# Altium PCB ExchangeDisplay.PcbDoc (part 2 of 3)
Units mil, origin at the board's own origin, x right, y up, seen from the top; angles counter-clockwise.
Board outline 17200 x 6515 mil, 2 copper layers (Top Layer, Bottom Layer); 256 components, 104 nets, 649 pads, 121 vias.
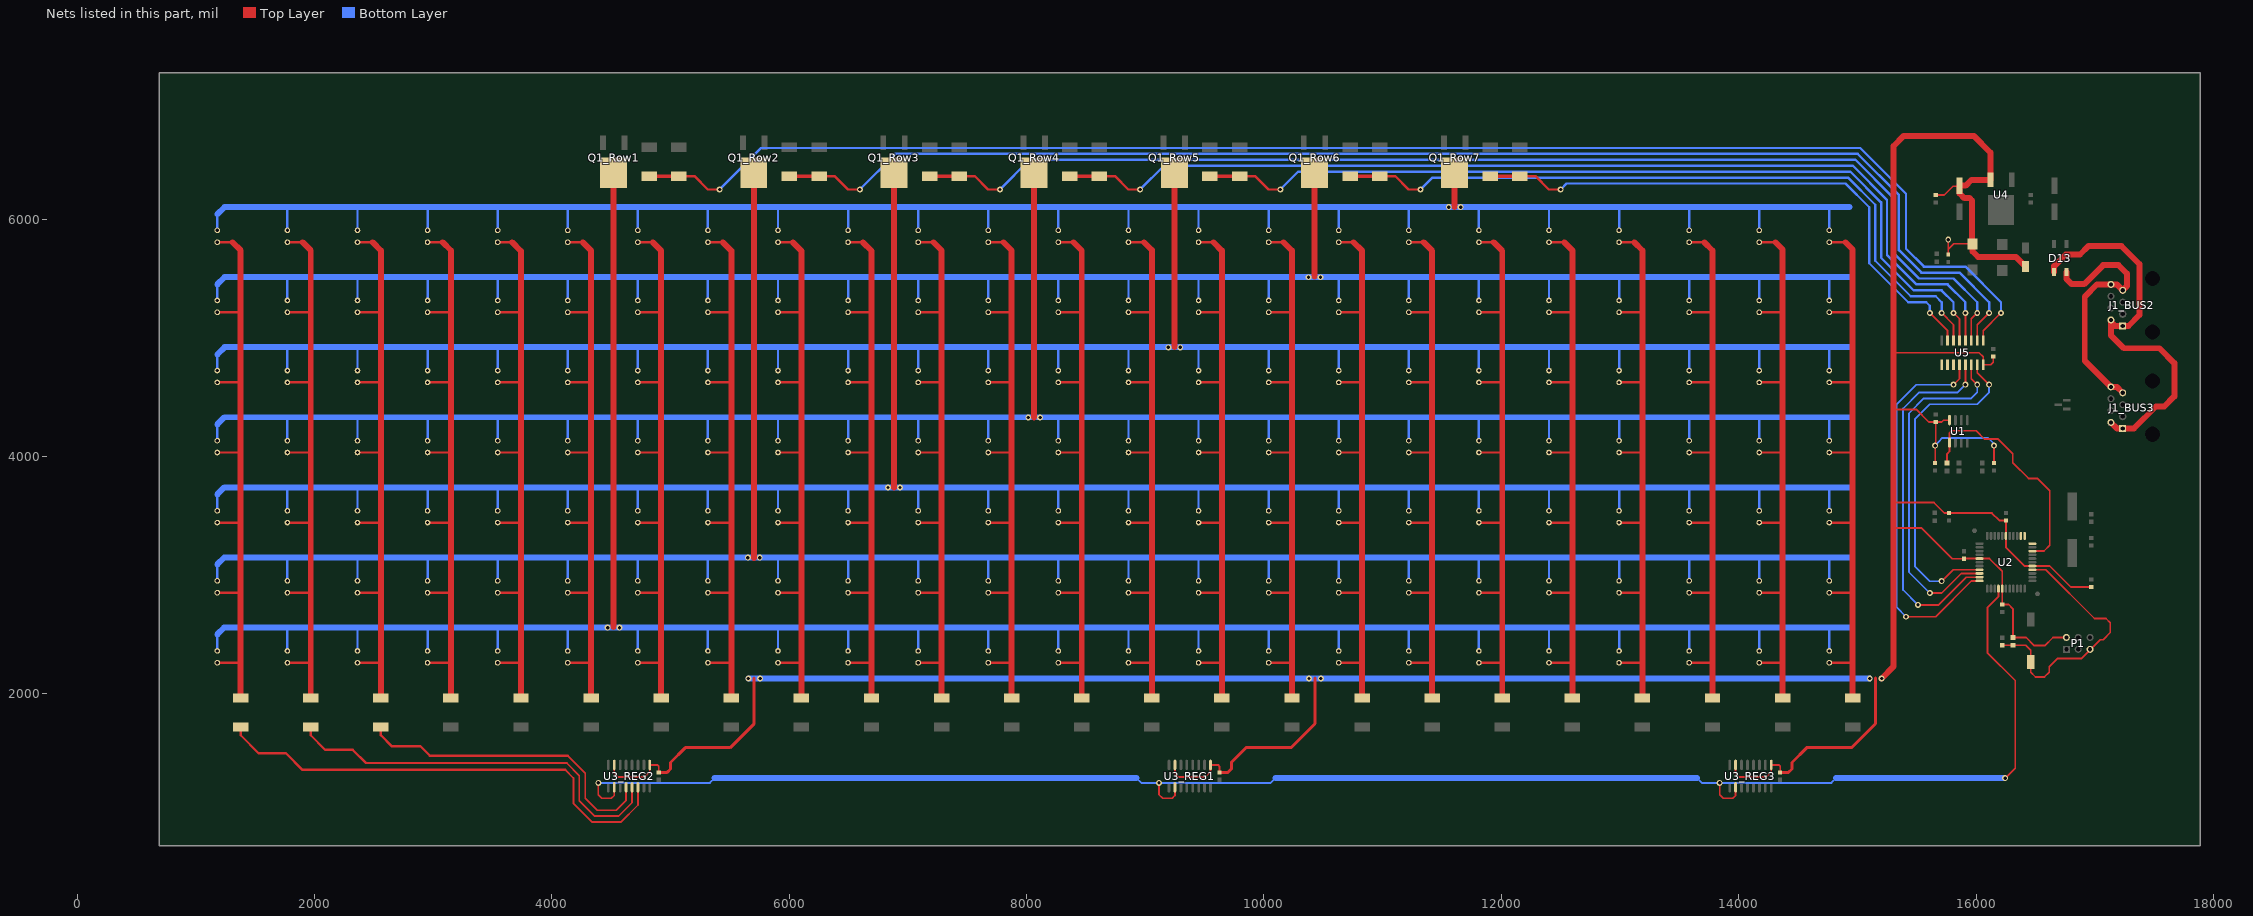
[diagram p2: the nets of this part, all layers, seen from the top]

## Via types
v1: diameter 50, hole 28, Top Layer to Bottom Layer, 121 vias

## Nets (pads, with @x,y where several pads share a name; then routed paths per layer and width w, separated by ;. In a path a pad name is that pad's centre, name@x,y a point inside that pad or via, vN(x,y) a via of type N, cw(c..) or ccw(c..) an arc to the next point about the centre after c; other vN are vias at no path point) (continued)
NetR30_2: R30.2 U3_REG2.12 | length 2665.4
  Top Layer w15: 4132.35,1480 4281.18,1331.17 4281.18,1120 4381.18,1020 4541.18,1020 4625.31,1104.13 U3_REG2.12@4625.31,1212.91
  Top Layer w20: R30.2@2559.05,1721.42 2559.05,1651.02 2650.08,1560 2891.18,1560 2971.18,1480 4132.35,1480
NetR31_2: R31.2 U3_REG2.13 | length 3359
  Top Layer w15: 4124.95,1417.4 4231.18,1311.17 4231.18,1100 4361.18,970 4561.18,970 4675.31,1084.13 U3_REG2.13@4675.31,1212.91
  Top Layer w20: R31.2@1968.5,1721.42 1968.5,1651.02 2089.53,1530 2321.18,1530 2433.78,1417.4 4124.95,1417.4
NetR32_2: R32.2 U3_REG2.14 | length 4052.8
  Top Layer w15: 4112.43,1360 4181.18,1291.25 4181.18,1080 4341.18,920 4581.18,920 4725.31,1064.13 U3_REG2.14@4725.31,1212.91
  Top Layer w20: R32.2@1377.95,1721.42 1377.95,1651.02 1528.98,1500 1758.98,1500 1898.98,1360 4112.43,1360
NetU5_9: U5.9
NetU5_10: U5.10
NetU5_11: U5.11
OUT_Row1: D5_Row1.A D6_Row1.A D7_Row1.A D8_Row1.A D9_Row1.A D10_Row1.A D11_Row1.A D17_Row1.A D18_Row1.A D19_Row1.A D20_Row1.A D21_Row1.A D22_Row1.A D23_Row1.A D24_Row1.A D25_Row1.A D26_Row1.A D27_Row1.A D28_Row1.A D29_Row1.A D30_Row1.A D31_Row1.A D32_Row1.A D33_Row1.A Q1_Row1.2 | length 22171.9
  Top Layer w50: 4520.28,2562 Q1_Row1.2@4520.28,6290.51
  Bottom Layer w20: D33_Row1.A@1181.1,2362.2 1181.1,2501.1 ; D32_Row1.A@1771.65,2362.2 1771.65,2559.05 ; D31_Row1.A@2362.2,2362.2 2362.2,2559.05 ; D30_Row1.A@2952.76,2362.2 2952.76,2559.05 ; D29_Row1.A@3543.31,2362.2 3543.31,2559.05 ; D28_Row1.A@4133.86,2362.2 4133.86,2559.05 ; D27_Row1.A@4724.41,2362.2 4724.41,2559.05 ; D26_Row1.A@5314.96,2362.2 5314.96,2559.05 ; D25_Row1.A@5905.51,2362.2 5905.51,2559.05 ; D24_Row1.A@6496.06,2362.2 6496.06,2559.05 ; D23_Row1.A@7086.61,2362.2 7086.61,2559.05 ; D22_Row1.A@7677.17,2362.2 7677.16,2559.05 ; D21_Row1.A@8267.72,2362.2 8267.72,2559.05 ; D20_Row1.A@8858.27,2362.2 8858.27,2559.05 ; D19_Row1.A@9448.82,2362.2 9448.82,2559.05 ; D18_Row1.A@10039.37,2362.2 10039.37,2559.05 ; D17_Row1.A@10629.92,2362.2 10629.92,2559.05 ; D11_Row1.A@11220.47,2362.2 11220.47,2559.05 ; D10_Row1.A@11811.02,2362.2 11811.02,2559.05 ; D9_Row1.A@12401.57,2362.2 12401.57,2559.05 ; D8_Row1.A@12992.13,2362.2 12992.13,2559.05 ; D7_Row1.A@13582.68,2362.2 13582.68,2559.05 ; D6_Row1.A@14173.23,2362.2 14173.23,2559.05 ; D5_Row1.A@14763.78,2362.2 14763.78,2559.05
  Bottom Layer w50: 1181.1,2501.1 1239.05,2559.05 14934,2559.05
  other v1: 4470.39,2557.69 4570.39,2557.69
OUT_Row2: D5_Row2.A D6_Row2.A D7_Row2.A D8_Row2.A D9_Row2.A D10_Row2.A D11_Row2.A D17_Row2.A D18_Row2.A D19_Row2.A D20_Row2.A D21_Row2.A D22_Row2.A D23_Row2.A D24_Row2.A D25_Row2.A D26_Row2.A D27_Row2.A D28_Row2.A D29_Row2.A D30_Row2.A D31_Row2.A D32_Row2.A D33_Row2.A Q1_Row2.2 | length 21587.5
  Top Layer w50: 5701.39,3146 Q1_Row2.2@5701.39,6290.51
  Bottom Layer w20: D33_Row2.A@1181.1,2952.76 1181.1,3091.1 ; D32_Row2.A@1771.65,2952.76 1771.65,3149.61 ; D31_Row2.A@2362.2,2952.76 2362.2,3149.61 ; D30_Row2.A@2952.76,2952.76 2952.76,3149.61 ; D29_Row2.A@3543.31,2952.76 3543.31,3149.61 ; D28_Row2.A@4133.86,2952.76 4133.86,3149.61 ; D27_Row2.A@4724.41,2952.76 4724.41,3149.61 ; D26_Row2.A@5314.96,2952.76 5314.96,3149.61 ; D25_Row2.A@5905.51,2952.76 5905.51,3149.61 ; D24_Row2.A@6496.06,2952.76 6496.06,3149.61 ; D23_Row2.A@7086.61,2952.76 7086.61,3149.61 ; D22_Row2.A@7677.17,2952.76 7677.16,3149.61 ; D21_Row2.A@8267.72,2952.76 8267.72,3149.61 ; D20_Row2.A@8858.27,2952.76 8858.27,3149.61 ; D19_Row2.A@9448.82,2952.76 9448.82,3149.61 ; D18_Row2.A@10039.37,2952.76 10039.37,3149.61 ; D17_Row2.A@10629.92,2952.76 10629.92,3149.61 ; D11_Row2.A@11220.47,2952.76 11220.47,3149.61 ; D10_Row2.A@11811.02,2952.76 11811.02,3149.61 ; D9_Row2.A@12401.57,2952.76 12401.57,3149.61 ; D8_Row2.A@12992.13,2952.76 12992.13,3149.61 ; D7_Row2.A@13582.68,2952.76 13582.68,3149.61 ; D6_Row2.A@14173.23,2952.76 14173.23,3149.61 ; D5_Row2.A@14763.78,2952.76 14763.78,3149.61
  Bottom Layer w50: 1181.1,3091.1 1239.61,3149.61 14934,3149.61
  other v1: 5651.49,3148.24 5751.49,3148.24
OUT_Row3: D5_Row3.A D6_Row3.A D7_Row3.A D8_Row3.A D9_Row3.A D10_Row3.A D11_Row3.A D17_Row3.A D18_Row3.A D19_Row3.A D20_Row3.A D21_Row3.A D22_Row3.A D23_Row3.A D24_Row3.A D25_Row3.A D26_Row3.A D27_Row3.A D28_Row3.A D29_Row3.A D30_Row3.A D31_Row3.A D32_Row3.A D33_Row3.A Q1_Row3.2 | length 20996.2
  Top Layer w50: 6882.49,3737 Q1_Row3.2@6882.49,6290.51
  Bottom Layer w20: D33_Row3.A@1181.1,3543.31 1181.1,3681.1 ; D32_Row3.A@1771.65,3543.31 1771.65,3740.16 ; D31_Row3.A@2362.2,3543.31 2362.2,3740.16 ; D30_Row3.A@2952.76,3543.31 2952.76,3740.16 ; D29_Row3.A@3543.31,3543.31 3543.31,3740.16 ; D28_Row3.A@4133.86,3543.31 4133.86,3740.16 ; D27_Row3.A@4724.41,3543.31 4724.41,3740.16 ; D26_Row3.A@5314.96,3543.31 5314.96,3740.16 ; D25_Row3.A@5905.51,3543.31 5905.51,3740.16 ; D24_Row3.A@6496.06,3543.31 6496.06,3740.16 ; D23_Row3.A@7086.61,3543.31 7086.61,3740.16 ; D22_Row3.A@7677.17,3543.31 7677.16,3740.16 ; D21_Row3.A@8267.72,3543.31 8267.72,3740.16 ; D20_Row3.A@8858.27,3543.31 8858.27,3740.16 ; D19_Row3.A@9448.82,3543.31 9448.82,3740.16 ; D18_Row3.A@10039.37,3543.31 10039.37,3740.16 ; D17_Row3.A@10629.92,3543.31 10629.92,3740.16 ; D11_Row3.A@11220.47,3543.31 11220.47,3740.16 ; D10_Row3.A@11811.02,3543.31 11811.02,3740.16 ; D9_Row3.A@12401.57,3543.31 12401.57,3740.16 ; D8_Row3.A@12992.13,3543.31 12992.13,3740.16 ; D7_Row3.A@13582.68,3543.31 13582.68,3740.16 ; D6_Row3.A@14173.23,3543.31 14173.23,3740.16 ; D5_Row3.A@14763.78,3543.31 14763.78,3740.16
  Bottom Layer w50: 1181.1,3681.1 1240.16,3740.16 14934,3740.16
  other v1: 6832.59,3738.8 6932.59,3738.8
OUT_Row4: D5_Row4.A D6_Row4.A D7_Row4.A D8_Row4.A D9_Row4.A D10_Row4.A D11_Row4.A D17_Row4.A D18_Row4.A D19_Row4.A D20_Row4.A D21_Row4.A D22_Row4.A D23_Row4.A D24_Row4.A D25_Row4.A D26_Row4.A D27_Row4.A D28_Row4.A D29_Row4.A D30_Row4.A D31_Row4.A D32_Row4.A D33_Row4.A Q1_Row4.2 | length 20402.9
  Top Layer w50: 8063.59,4330 Q1_Row4.2@8063.59,6290.51
  Bottom Layer w20: D33_Row4.A@1181.1,4133.86 1181.1,4271.1 ; D32_Row4.A@1771.65,4133.86 1771.65,4330.71 ; D31_Row4.A@2362.2,4133.86 2362.2,4330.71 ; D30_Row4.A@2952.76,4133.86 2952.76,4330.71 ; D29_Row4.A@3543.31,4133.86 3543.31,4330.71 ; D28_Row4.A@4133.86,4133.86 4133.86,4330.71 ; D27_Row4.A@4724.41,4133.86 4724.41,4330.71 ; D26_Row4.A@5314.96,4133.86 5314.96,4330.71 ; D25_Row4.A@5905.51,4133.86 5905.51,4330.71 ; D24_Row4.A@6496.06,4133.86 6496.06,4330.71 ; D23_Row4.A@7086.61,4133.86 7086.61,4330.71 ; D22_Row4.A@7677.17,4133.86 7677.16,4330.71 ; D21_Row4.A@8267.72,4133.86 8267.72,4330.71 ; D20_Row4.A@8858.27,4133.86 8858.27,4330.71 ; D19_Row4.A@9448.82,4133.86 9448.82,4330.71 ; D18_Row4.A@10039.37,4133.86 10039.37,4330.71 ; D17_Row4.A@10629.92,4133.86 10629.92,4330.71 ; D11_Row4.A@11220.47,4133.86 11220.47,4330.71 ; D10_Row4.A@11811.02,4133.86 11811.02,4330.71 ; D9_Row4.A@12401.57,4133.86 12401.57,4330.71 ; D8_Row4.A@12992.13,4133.86 12992.13,4330.71 ; D7_Row4.A@13582.68,4133.86 13582.68,4330.71 ; D6_Row4.A@14173.23,4133.86 14173.23,4330.71 ; D5_Row4.A@14763.78,4133.86 14763.78,4330.71
  Bottom Layer w50: 1181.1,4271.1 1240.71,4330.71 14934,4330.71
  other v1: 8013.69,4329.35 8113.69,4329.35
OUT_Row5: D5_Row5.A D6_Row5.A D7_Row5.A D8_Row5.A D9_Row5.A D10_Row5.A D11_Row5.A D17_Row5.A D18_Row5.A D19_Row5.A D20_Row5.A D21_Row5.A D22_Row5.A D23_Row5.A D24_Row5.A D25_Row5.A D26_Row5.A D27_Row5.A D28_Row5.A D29_Row5.A D30_Row5.A D31_Row5.A D32_Row5.A D33_Row5.A Q1_Row5.2 | length 19809.9
  Top Layer w50: 9244.69,4922 Q1_Row5.2@9244.69,6290.51
  Bottom Layer w20: D33_Row5.A@1181.1,4724.41 1181.1,4860 ; D32_Row5.A@1771.65,4724.41 1771.65,4921.26 ; D31_Row5.A@2362.2,4724.41 2362.2,4921.26 ; D30_Row5.A@2952.76,4724.41 2952.76,4921.26 ; D29_Row5.A@3543.31,4724.41 3543.31,4921.26 ; D28_Row5.A@4133.86,4724.41 4133.86,4921.26 ; D27_Row5.A@4724.41,4724.41 4724.41,4921.26 ; D26_Row5.A@5314.96,4724.41 5314.96,4921.26 ; D25_Row5.A@5905.51,4724.41 5905.51,4921.26 ; D24_Row5.A@6496.06,4724.41 6496.06,4921.26 ; D23_Row5.A@7086.61,4724.41 7086.61,4921.26 ; D22_Row5.A@7677.17,4724.41 7677.16,4921.26 ; D21_Row5.A@8267.72,4724.41 8267.72,4921.26 ; D20_Row5.A@8858.27,4724.41 8858.27,4921.26 ; D19_Row5.A@9448.82,4724.41 9448.82,4921.26 ; D18_Row5.A@10039.37,4724.41 10039.37,4921.26 ; D17_Row5.A@10629.92,4724.41 10629.92,4921.26 ; D11_Row5.A@11220.47,4724.41 11220.47,4921.26 ; D10_Row5.A@11811.02,4724.41 11811.02,4921.26 ; D9_Row5.A@12401.57,4724.41 12401.57,4921.26 ; D8_Row5.A@12992.13,4724.41 12992.13,4921.26 ; D7_Row5.A@13582.68,4724.41 13582.68,4921.26 ; D6_Row5.A@14173.23,4724.41 14173.23,4921.26 ; D5_Row5.A@14763.78,4724.41 14763.78,4921.26
  Bottom Layer w50: 1181.1,4860 1242.36,4921.26 14934,4921.26
  other v1: 9194.8,4919.9 9294.8,4919.9
OUT_Row6: D5_Row6.A D6_Row6.A D7_Row6.A D8_Row6.A D9_Row6.A D10_Row6.A D11_Row6.A D17_Row6.A D18_Row6.A D19_Row6.A D20_Row6.A D21_Row6.A D22_Row6.A D23_Row6.A D24_Row6.A D25_Row6.A D26_Row6.A D27_Row6.A D28_Row6.A D29_Row6.A D30_Row6.A D31_Row6.A D32_Row6.A D33_Row6.A Q1_Row6.2 | length 19216.2
  Top Layer w50: 10425.8,5516 Q1_Row6.2@10425.8,6290.51
  Bottom Layer w20: D33_Row6.A@1181.1,5314.96 1181.1,5451.1 ; D32_Row6.A@1771.65,5314.96 1771.65,5511.81 ; D31_Row6.A@2362.2,5314.96 2362.2,5511.81 ; D30_Row6.A@2952.76,5314.96 2952.76,5511.81 ; D29_Row6.A@3543.31,5314.96 3543.31,5511.81 ; D28_Row6.A@4133.86,5314.96 4133.86,5511.81 ; D27_Row6.A@4724.41,5314.96 4724.41,5511.81 ; D26_Row6.A@5314.96,5314.96 5314.96,5511.81 ; D25_Row6.A@5905.51,5314.96 5905.51,5511.81 ; D24_Row6.A@6496.06,5314.96 6496.06,5511.81 ; D23_Row6.A@7086.61,5314.96 7086.61,5511.81 ; D22_Row6.A@7677.17,5314.96 7677.17,5511.81 ; D21_Row6.A@8267.72,5314.96 8267.72,5511.81 ; D20_Row6.A@8858.27,5314.96 8858.27,5511.81 ; D19_Row6.A@9448.82,5314.96 9448.82,5511.81 ; D18_Row6.A@10039.37,5314.96 10039.37,5511.81 ; D17_Row6.A@10629.92,5314.96 10629.92,5511.81 ; D11_Row6.A@11220.47,5314.96 11220.47,5511.81 ; D10_Row6.A@11811.02,5314.96 11811.02,5511.81 ; D9_Row6.A@12401.57,5314.96 12401.57,5511.81 ; D8_Row6.A@12992.13,5314.96 12992.13,5511.81 ; D7_Row6.A@13582.68,5314.96 13582.68,5511.81 ; D6_Row6.A@14173.23,5314.96 14173.23,5511.81 ; D5_Row6.A@14763.78,5314.96 14763.78,5511.81
  Bottom Layer w50: 1181.1,5451.1 1241.81,5511.81 14934,5511.81
  other v1: 10375.9,5510.45 10475.9,5510.45
OUT_Row7: D5_Row7.A D6_Row7.A D7_Row7.A D8_Row7.A D9_Row7.A D10_Row7.A D11_Row7.A D17_Row7.A D18_Row7.A D19_Row7.A D20_Row7.A D21_Row7.A D22_Row7.A D23_Row7.A D24_Row7.A D25_Row7.A D26_Row7.A D27_Row7.A D28_Row7.A D29_Row7.A D30_Row7.A D31_Row7.A D32_Row7.A D33_Row7.A Q1_Row7.2 | length 18627.9
  Top Layer w50: 11606.9,6104 Q1_Row7.2@11606.9,6290.51
  Bottom Layer w20: D33_Row7.A@1181.1,5905.51 1181.1,6041.1 ; D32_Row7.A@1771.65,5905.51 1771.65,6102.36 ; D31_Row7.A@2362.2,5905.51 2362.2,6102.36 ; D30_Row7.A@2952.76,5905.51 2952.76,6102.36 ; D29_Row7.A@3543.31,5905.51 3543.31,6102.36 ; D28_Row7.A@4133.86,5905.51 4133.86,6102.36 ; D27_Row7.A@4724.41,5905.51 4724.41,6102.36 ; D26_Row7.A@5314.96,5905.51 5314.96,6102.36 ; D25_Row7.A@5905.51,5905.51 5905.51,6102.36 ; D24_Row7.A@6496.06,5905.51 6496.06,6102.36 ; D23_Row7.A@7086.61,5905.51 7086.61,6102.36 ; D22_Row7.A@7677.17,5905.51 7677.16,6102.36 ; D21_Row7.A@8267.72,5905.51 8267.72,6102.36 ; D20_Row7.A@8858.27,5905.51 8858.27,6102.36 ; D19_Row7.A@9448.82,5905.51 9448.82,6102.36 ; D18_Row7.A@10039.37,5905.51 10039.37,6102.36 ; D17_Row7.A@10629.92,5905.51 10629.92,6102.36 ; D11_Row7.A@11220.47,5905.51 11220.47,6102.36 ; D10_Row7.A@11811.02,5905.51 11811.02,6102.36 ; D9_Row7.A@12401.57,5905.51 12401.57,6102.36 ; D8_Row7.A@12992.13,5905.51 12992.13,6102.36 ; D7_Row7.A@13582.68,5905.51 13582.68,6102.36 ; D6_Row7.A@14173.23,5905.51 14173.23,6102.36 ; D5_Row7.A@14763.78,5905.51 14763.78,6102.36
  Bottom Layer w50: 1181.1,6041.1 1242.36,6102.36 14934,6102.36
  other v1: 11557,6101 11657,6101
PIN_A: U2.30 U5.15 | length 2868.2
  Top Layer w15: v1(15710,2950) 15806.1,3046.1 U2.30@16029.37,3046.1 ; U5.15@16010,4772.64 16010,4705.28 v1(16110,4605.28)
  Bottom Layer w15: v1(15710,2950) 15610,2950 15485,3075 15485,4315 15610,4440 16010,4440 16110,4540 v1(16110,4605.28)
PIN_B: U2.31 U5.14 | length 2975.9
  Top Layer w15: v1(15610,2850) 15710,2850 15874.61,3014.61 U2.31@16029.37,3014.61 ; U5.14@15960,4772.64 15960,4655.28 v1(16010,4605.28)
  Bottom Layer w15: v1(15610,2850) 15435,3025 15435,4365 15560,4490 15960,4490 16010,4540 v1(16010,4605.28)
PIN_C: U2.32 U5.13 | length 3098
  Top Layer w15: v1(15510,2750) 15685,2750 15918.11,2983.11 U2.32@16029.37,2983.11 ; v1(15910,4605.28) U5.13@15910,4772.64
  Bottom Layer w15: v1(15510,2750) 15385,2875 15385,4405 15520,4540 15844.72,4540 v1(15910,4605.28)
PIN_D: U2.33 U5.12 | length 3304
  Top Layer w15: v1(15410,2650) 15660,2650 15961.61,2951.61 U2.33@16029.37,2951.62 ; v1(15810,4605.28) 15860,4655.28 U5.12@15860,4772.64
  Bottom Layer w15: v1(15410,2650) 15330,2730 15330,4440 15495.28,4605.28 v1(15810,4605.28)
POWER_V+: D13.1 J1_BUS2.1 J1_BUS2.2 J1_BUS3.1 J1_BUS3.2 | length 3331
  Top Layer w50: D13.1@16658.15,5553.94 16658.15,5604.49 16755.71,5702.05 16875.71,5702.05 16945.71,5772.05 17225.71,5772.05 17375.71,5622.05 17375.71,5192.05 17284.09,5100.43 17172.32,5100.43 J1_BUS2.2@17135.75,5137.01 ; J1_BUS3.2@17135.71,4287.05 17185.71,4237.05 17330.71,4237.05 17515.71,4422.05 17585.71,4422.05 17670.71,4507.05 17670.71,4787.05 17545.71,4912.05 17245.71,4912.05 17135.75,5022.01 J1_BUS2.2@17135.75,5150.43
POWER_V-: D13.2 J1_BUS2.7 J1_BUS2.8 J1_BUS3.7 J1_BUS3.8 | length 2192.5
  Top Layer w50: D13.2@16763.27,5553.94 16763.27,5494.49 16805.71,5452.05 16910.71,5452.05 17070.71,5612.05 17200.71,5612.05 17270.71,5542.05 17270.71,5435.4 J1_BUS2.7@17235.75,5400.43 17185.75,5450.43 17019.09,5450.43 16915.71,5347.05 16915.71,4807.09 J1_BUS3.8@17135.71,4587.05 17185.71,4587.05 J1_BUS3.7@17233.21,4539.55 ; J1_BUS2.8@17135.75,5450.43 J1_BUS2.8@17139.13,5447.05
RCK: U2.37 U3_REG1.10 U3_REG2.10 U3_REG3.10 | length 14680.4
  Top Layer w15: v1(4391.18,1250) 4391.18,1150 4421.18,1120 4501.18,1120 4525.31,1144.13 U3_REG2.10@4525.31,1212.91 ; v1(9115.59,1250) 9115.59,1150 9145.59,1120 9225.59,1120 9249.72,1144.13 U3_REG1.10@9249.72,1212.91 ; v1(13840,1250) 13840,1150 13870,1120 13950,1120 13974.13,1144.13 U3_REG3.10@13974.13,1212.91 ; U2.37@16188.42,2886.26 16188.42,2819.76 16095.71,2727.05 16095.71,2347.05 16330,2112.76 16330,1375 v1(16245,1290)
  Bottom Layer w15: v1@4381.18,1250 5332.11,1250 ; 5331.65,1250.47 5371.18,1290 ; 8925.59,1290 8965.59,1250 10056.52,1250 ; 10056.06,1250.47 10095.59,1290 ; 13650,1290 13690,1250 14780.93,1250 ; 14780.47,1250.47 14820,1290
  Bottom Layer w50: 5371.18,1290 8925.59,1290 ; 10095.59,1290 13650,1290 ; 14820,1290 v1@16235,1290
RES01: D5_Row1.K D5_Row2.K D5_Row3.K D5_Row4.K D5_Row5.K D5_Row6.K D5_Row7.K R9.1 | length 5182.4
  Top Layer w20: D5_Row1.K@14763.78,2262.2 14960.63,2262.21 ; D5_Row2.K@14763.78,2852.76 14960.63,2852.76 ; D5_Row3.K@14763.78,3443.31 14960.63,3443.31 ; D5_Row4.K@14763.78,4033.86 14960.63,4033.86 ; D5_Row5.K@14763.78,4624.41 14960.63,4624.41 ; D5_Row6.K@14763.78,5214.96 14960.63,5214.96 ; D5_Row7.K@14763.78,5805.51 14900,5805.51
  Top Layer w50: 14900,5805.51 14960.63,5744.88 R9.1@14960.63,1965.51
RES02: D6_Row1.K D6_Row2.K D6_Row3.K D6_Row4.K D6_Row5.K D6_Row6.K D6_Row7.K R11.1 | length 5182.5
  Top Layer w20: D6_Row1.K@14173.23,2262.2 14370.08,2262.21 ; D6_Row2.K@14173.23,2852.76 14370.08,2852.76 ; D6_Row3.K@14173.23,3443.31 14370.08,3443.31 ; D6_Row4.K@14173.23,4033.86 14370.08,4033.86 ; D6_Row5.K@14173.23,4624.41 14370.08,4624.41 ; D6_Row6.K@14173.23,5214.96 14370.08,5214.96 ; D6_Row7.K@14173.23,5805.51 14309.49,5805.51
  Top Layer w50: 14309.49,5805.51 14370.08,5744.92 R11.1@14370.08,1965.51
RES03: D7_Row1.K D7_Row2.K D7_Row3.K D7_Row4.K D7_Row5.K D7_Row6.K D7_Row7.K R13.1 | length 5177.2
  Top Layer w20: D7_Row1.K@13582.68,2262.2 13779.53,2262.21 ; D7_Row2.K@13582.68,2852.76 13779.53,2852.76 ; D7_Row3.K@13582.68,3443.31 13779.53,3443.31 ; D7_Row4.K@13582.68,4033.86 13779.53,4033.86 ; D7_Row5.K@13582.68,4624.41 13779.53,4624.41 ; D7_Row6.K@13582.68,5214.96 13779.53,5214.96 ; D7_Row7.K@13582.68,5805.51 13710,5805.51
  Top Layer w50: 13710,5805.51 13779.53,5735.98 R13.1@13779.53,1965.51
RES04: D8_Row1.K D8_Row2.K D8_Row3.K D8_Row4.K D8_Row5.K D8_Row6.K D8_Row7.K R15.1 | length 5177.5
  Top Layer w20: D8_Row1.K@12992.13,2262.2 13188.98,2262.21 ; D8_Row2.K@12992.13,2852.76 13188.98,2852.76 ; D8_Row3.K@12992.13,3443.31 13188.98,3443.31 ; D8_Row4.K@12992.13,4033.86 13188.98,4033.86 ; D8_Row5.K@12992.13,4624.41 13188.98,4624.41 ; D8_Row6.K@12992.13,5214.96 13188.98,5214.96 ; D8_Row7.K@12992.13,5805.51 13120,5805.51
  Top Layer w50: 13120,5805.51 13188.98,5736.54 R15.1@13188.98,1965.51
RES05: D9_Row1.K D9_Row2.K D9_Row3.K D9_Row4.K D9_Row5.K D9_Row6.K D9_Row7.K R17.1 | length 5177.9
  Top Layer w20: D9_Row2.K@12401.57,2852.76 12598.42,2852.76 ; D9_Row3.K@12401.57,3443.31 12598.42,3443.31 ; D9_Row4.K@12401.57,4033.86 12598.42,4033.86 ; D9_Row5.K@12401.57,4624.41 12598.42,4624.41 ; D9_Row6.K@12401.57,5214.96 12598.42,5214.96 ; D9_Row7.K@12401.57,5805.51 12530,5805.51 ; D9_Row1.K@12401.57,2262.2 12598.42,2262.2
  Top Layer w50: 12530,5805.51 12598.42,5737.09 R17.1@12598.42,1965.51
RES06: D10_Row1.K D10_Row2.K D10_Row3.K D10_Row4.K D10_Row5.K D10_Row6.K D10_Row7.K R19.1 | length 5175.3
  Top Layer w20: D10_Row1.K@11811.02,2262.2 12007.87,2262.21 ; D10_Row2.K@11811.02,2852.76 12007.87,2852.76 ; D10_Row3.K@11811.02,3443.31 12007.87,3443.31 ; D10_Row4.K@11811.02,4033.86 12007.87,4033.86 ; D10_Row5.K@11811.02,4624.41 12007.87,4624.41 ; D10_Row6.K@11811.02,5214.96 12007.87,5214.96 ; D10_Row7.K@11811.02,5805.51 11935,5805.51
  Top Layer w50: 11935,5805.51 12007.87,5732.64 R19.1@12007.87,1965.51
RES07: D11_Row1.K D11_Row2.K D11_Row3.K D11_Row4.K D11_Row5.K D11_Row6.K D11_Row7.K R21.1 | length 5175.6
  Top Layer w20: D11_Row1.K@11220.47,2262.2 11417.32,2262.2 ; D11_Row2.K@11220.47,2852.76 11417.32,2852.76 ; D11_Row3.K@11220.47,3443.31 11417.32,3443.31 ; D11_Row4.K@11220.47,4033.86 11417.32,4033.86 ; D11_Row5.K@11220.47,4624.41 11417.32,4624.41 ; D11_Row6.K@11220.47,5214.96 11417.32,5214.96 ; D11_Row7.K@11220.47,5805.51 11345,5805.51
  Top Layer w50: 11345,5805.51 11417.32,5733.19 R21.1@11417.32,1965.51
RES08: D17_Row1.K D17_Row2.K D17_Row3.K D17_Row4.K D17_Row5.K D17_Row6.K D17_Row7.K R23.1 | length 5175.9
  Top Layer w20: D17_Row1.K@10629.92,2262.2 10826.77,2262.21 ; D17_Row2.K@10629.92,2852.76 10826.77,2852.76 ; D17_Row3.K@10629.92,3443.31 10826.77,3443.31 ; D17_Row4.K@10629.92,4033.86 10826.77,4033.86 ; D17_Row5.K@10629.92,4624.41 10826.77,4624.41 ; D17_Row6.K@10629.92,5214.96 10826.77,5214.96 ; D17_Row7.K@10629.92,5805.51 10755,5805.51
  Top Layer w50: 10755,5805.51 10826.77,5733.74 R23.1@10826.77,1965.51
RES11: D26_Row1.K D26_Row2.K D26_Row3.K D26_Row4.K D26_Row5.K D26_Row6.K D26_Row7.K R25.1 | length 5175.9
  Top Layer w20: D26_Row1.K@5314.96,2262.2 5511.81,2262.21 ; D26_Row2.K@5314.96,2852.76 5511.81,2852.76 ; D26_Row3.K@5314.96,3443.31 5511.81,3443.31 ; D26_Row4.K@5314.96,4033.86 5511.81,4033.86 ; D26_Row5.K@5314.96,4624.41 5511.81,4624.41 ; D26_Row6.K@5314.96,5214.96 5511.81,5214.96 ; D26_Row7.K@5314.96,5805.51 5440,5805.51
  Top Layer w50: 5440,5805.51 5511.81,5733.7 R25.1@5511.81,1965.51
RES12: D27_Row1.K D27_Row2.K D27_Row3.K D27_Row4.K D27_Row5.K D27_Row6.K D27_Row7.K R26.1 | length 5176.2
  Top Layer w20: D27_Row1.K@4724.41,2262.2 4921.26,2262.21 ; D27_Row2.K@4724.41,2852.76 4921.26,2852.76 ; D27_Row3.K@4724.41,3443.31 4921.26,3443.31 ; D27_Row4.K@4724.41,4033.86 4921.26,4033.86 ; D27_Row5.K@4724.41,4624.41 4921.26,4624.41 ; D27_Row6.K@4724.41,5214.96 4921.26,5214.96 ; D27_Row7.K@4724.41,5805.51 4850,5805.51
  Top Layer w50: 4850,5805.51 4921.26,5734.25 R26.1@4921.26,1965.51
RES13: D28_Row1.K D28_Row2.K D28_Row3.K D28_Row4.K D28_Row5.K D28_Row6.K D28_Row7.K R27.1 | length 5176.5
  Top Layer w20: D28_Row1.K@4133.86,2262.2 4330.71,2262.21 ; D28_Row2.K@4133.86,2852.76 4330.71,2852.76 ; D28_Row3.K@4133.86,3443.31 4330.71,3443.31 ; D28_Row4.K@4133.86,4033.86 4330.71,4033.86 ; D28_Row5.K@4133.86,4624.41 4330.71,4624.41 ; D28_Row6.K@4133.86,5214.96 4330.71,5214.96 ; D28_Row7.K@4133.86,5805.51 4260,5805.51
  Top Layer w50: 4260,5805.51 4330.71,5734.8 R27.1@4330.71,1965.51
RES14: D29_Row1.K D29_Row2.K D29_Row3.K D29_Row4.K D29_Row5.K D29_Row6.K D29_Row7.K R28.1 | length 5173.9
  Top Layer w20: D29_Row1.K@3543.31,2262.2 3740.16,2262.21 ; D29_Row2.K@3543.31,2852.76 3740.16,2852.76 ; D29_Row3.K@3543.31,3443.31 3740.16,3443.31 ; D29_Row4.K@3543.31,4033.86 3740.16,4033.86 ; D29_Row5.K@3543.31,4624.41 3740.16,4624.41 ; D29_Row6.K@3543.31,5214.96 3740.16,5214.96 ; D29_Row7.K@3543.31,5805.51 3665,5805.51
  Top Layer w50: 3665,5805.51 3740.16,5730.35 R28.1@3740.16,1965.51
RES15: D30_Row1.K D30_Row2.K D30_Row3.K D30_Row4.K D30_Row5.K D30_Row6.K D30_Row7.K R29.1 | length 5177.2
  Top Layer w20: D30_Row1.K@2952.76,2262.2 3149.61,2262.21 ; D30_Row2.K@2952.76,2852.76 3149.61,2852.76 ; D30_Row3.K@2952.76,3443.31 3149.61,3443.31 ; D30_Row4.K@2952.76,4033.86 3149.61,4033.86 ; D30_Row5.K@2952.76,4624.41 3149.61,4624.41 ; D30_Row6.K@2952.76,5214.96 3149.61,5214.96 ; D30_Row7.K@2952.76,5805.51 3080,5805.51
  Top Layer w50: 3080,5805.51 3149.61,5735.91 R29.1@3149.61,1965.51
RES16: D31_Row1.K D31_Row2.K D31_Row3.K D31_Row4.K D31_Row5.K D31_Row6.K D31_Row7.K R30.1 | length 5177.5
  Top Layer w20: D31_Row1.K@2362.2,2262.2 2559.05,2262.21 ; D31_Row2.K@2362.2,2852.76 2559.05,2852.76 ; D31_Row3.K@2362.2,3443.31 2559.05,3443.31 ; D31_Row4.K@2362.2,4033.86 2559.05,4033.86 ; D31_Row5.K@2362.2,4624.41 2559.05,4624.41 ; D31_Row6.K@2362.2,5214.96 2559.05,5214.96 ; D31_Row7.K@2362.2,5805.51 2490,5805.51
  Top Layer w50: 2490,5805.51 2559.05,5736.46 R30.1@2559.05,1965.51
RES17: D32_Row1.K D32_Row2.K D32_Row3.K D32_Row4.K D32_Row5.K D32_Row6.K D32_Row7.K R31.1 | length 5177.8
  Top Layer w20: D32_Row1.K@1771.65,2262.2 1968.5,2262.21 ; D32_Row2.K@1771.65,2852.76 1968.5,2852.76 ; D32_Row3.K@1771.65,3443.31 1968.5,3443.31 ; D32_Row4.K@1771.65,4033.86 1968.5,4033.86 ; D32_Row5.K@1771.65,4624.41 1968.5,4624.41 ; D32_Row6.K@1771.65,5214.96 1968.5,5214.96 ; D32_Row7.K@1771.65,5805.51 1900,5805.51
  Top Layer w50: 1900,5805.51 1968.5,5737.01 R31.1@1968.5,1965.51
RES18: D33_Row1.K D33_Row2.K D33_Row3.K D33_Row4.K D33_Row5.K D33_Row6.K D33_Row7.K R32.1 | length 5177.8
  Top Layer w20: D33_Row1.K@1181.1,2262.2 1377.95,2262.21 ; D33_Row2.K@1181.1,2852.76 1377.95,2852.76 ; D33_Row3.K@1181.1,3443.31 1377.95,3443.31 ; D33_Row4.K@1181.1,4033.86 1377.95,4033.86 ; D33_Row5.K@1181.1,4624.41 1377.95,4624.41 ; D33_Row6.K@1181.1,5214.96 1377.95,5214.96 ; D33_Row7.K@1181.1,5805.51 1309.49,5805.51
  Top Layer w50: 1309.49,5805.51 1377.95,5737.05 R32.1@1377.95,1965.51
RES21: D18_Row1.K D18_Row2.K D18_Row3.K D18_Row4.K D18_Row5.K D18_Row6.K D18_Row7.K R10.1 | length 5176.2
  Top Layer w20: D18_Row1.K@10039.37,2262.2 10236.22,2262.21 ; D18_Row2.K@10039.37,2852.76 10236.22,2852.76 ; D18_Row3.K@10039.37,3443.31 10236.22,3443.31 ; D18_Row4.K@10039.37,4033.86 10236.22,4033.86 ; D18_Row5.K@10039.37,4624.41 10236.22,4624.41 ; D18_Row6.K@10039.37,5214.96 10236.22,5214.96 ; D18_Row7.K@10039.37,5805.51 10165,5805.51
  Top Layer w50: 10165,5805.51 10236.22,5734.29 R10.1@10236.22,1965.51
RES22: D19_Row1.K D19_Row2.K D19_Row3.K D19_Row4.K D19_Row5.K D19_Row6.K D19_Row7.K R12.1 | length 5176.6
  Top Layer w20: D19_Row1.K@9448.82,2262.2 9645.67,2262.21 ; D19_Row2.K@9448.82,2852.76 9645.67,2852.76 ; D19_Row3.K@9448.82,3443.31 9645.67,3443.31 ; D19_Row4.K@9448.82,4033.86 9645.67,4033.86 ; D19_Row5.K@9448.82,4624.41 9645.67,4624.41 ; D19_Row6.K@9448.82,5214.96 9645.67,5214.96 ; D19_Row7.K@9448.82,5805.51 9575,5805.51
  Top Layer w50: 9575,5805.51 9645.67,5734.84 R12.1@9645.67,1965.51
RES23: D20_Row1.K D20_Row2.K D20_Row3.K D20_Row4.K D20_Row5.K D20_Row6.K D20_Row7.K R14.1 | length 5179.5
  Top Layer w20: D20_Row1.K@8858.27,2262.2 9055.12,2262.21 ; D20_Row2.K@8858.27,2852.76 9055.12,2852.76 ; D20_Row3.K@8858.27,3443.31 9055.12,3443.31 ; D20_Row4.K@8858.27,4033.86 9055.12,4033.86 ; D20_Row5.K@8858.27,4624.41 9055.12,4624.41 ; D20_Row6.K@8858.27,5214.96 9055.12,5214.96 ; D20_Row7.K@8858.27,5805.51 8989.49,5805.51
  Top Layer w50: 8989.49,5805.51 9055.12,5739.88 R14.1@9055.12,1965.51
RES24: D21_Row1.K D21_Row2.K D21_Row3.K D21_Row4.K D21_Row5.K D21_Row6.K D21_Row7.K R16.1 | length 5177.2
  Top Layer w20: D21_Row1.K@8267.72,2262.2 8464.57,2262.21 ; D21_Row2.K@8267.72,2852.76 8464.57,2852.76 ; D21_Row3.K@8267.72,3443.31 8464.57,3443.31 ; D21_Row4.K@8267.72,4033.86 8464.57,4033.86 ; D21_Row5.K@8267.72,4624.41 8464.57,4624.41 ; D21_Row6.K@8267.72,5214.96 8464.57,5214.96 ; D21_Row7.K@8267.72,5805.51 8395,5805.51
  Top Layer w50: 8395,5805.51 8464.57,5735.95 R16.1@8464.57,1965.51
RES25: D22_Row1.K D22_Row2.K D22_Row3.K D22_Row4.K D22_Row5.K D22_Row6.K D22_Row7.K R18.1 | length 5177.5
  Top Layer w20: D22_Row1.K@7677.17,2262.2 7874.02,2262.21 ; D22_Row2.K@7677.17,2852.76 7874.02,2852.76 ; D22_Row3.K@7677.17,3443.31 7874.02,3443.31 ; D22_Row4.K@7677.17,4033.86 7874.02,4033.86 ; D22_Row5.K@7677.17,4624.41 7874.02,4624.41 ; D22_Row6.K@7677.17,5214.96 7874.02,5214.96 ; D22_Row7.K@7677.17,5805.51 7805,5805.51
  Top Layer w50: 7805,5805.51 7874.02,5736.5 R18.1@7874.02,1965.51
RES26: D23_Row1.K D23_Row2.K D23_Row3.K D23_Row4.K D23_Row5.K D23_Row6.K D23_Row7.K R20.1 | length 5177.8
  Top Layer w20: D23_Row1.K@7086.61,2262.2 7283.46,2262.21 ; D23_Row2.K@7086.61,2852.76 7283.46,2852.76 ; D23_Row3.K@7086.61,3443.31 7283.46,3443.31 ; D23_Row4.K@7086.61,4033.86 7283.46,4033.86 ; D23_Row5.K@7086.61,4624.41 7283.46,4624.41 ; D23_Row6.K@7086.61,5214.96 7283.46,5214.96 ; D23_Row7.K@7086.61,5805.51 7215,5805.51
  Top Layer w50: 7215,5805.51 7283.46,5737.05 R20.1@7283.46,1965.51
RES27: D24_Row1.K D24_Row2.K D24_Row3.K D24_Row4.K D24_Row5.K D24_Row6.K D24_Row7.K R22.1 | length 5175.2
  Top Layer w20: D24_Row1.K@6496.06,2262.2 6692.91,2262.21 ; D24_Row2.K@6496.06,2852.76 6692.91,2852.76 ; D24_Row3.K@6496.06,3443.31 6692.91,3443.31 ; D24_Row4.K@6496.06,4033.86 6692.91,4033.86 ; D24_Row5.K@6496.06,4624.41 6692.91,4624.41 ; D24_Row6.K@6496.06,5214.96 6692.91,5214.96 ; D24_Row7.K@6496.06,5805.51 6620,5805.51
  Top Layer w50: 6620,5805.51 6692.91,5732.6 R22.1@6692.91,1965.51
RES28: D25_Row1.K D25_Row2.K D25_Row3.K D25_Row4.K D25_Row5.K D25_Row6.K D25_Row7.K R24.1 | length 5175.6
  Top Layer w20: D25_Row1.K@5905.51,2262.2 6102.36,2262.21 ; D25_Row2.K@5905.51,2852.76 6102.36,2852.76 ; D25_Row3.K@5905.51,3443.31 6102.36,3443.31 ; D25_Row4.K@5905.51,4033.86 6102.36,4033.86 ; D25_Row5.K@5905.51,4624.41 6102.36,4624.41 ; D25_Row6.K@5905.51,5214.96 6102.36,5214.96 ; D25_Row7.K@5905.51,5805.51 6030,5805.51
  Top Layer w50: 6030,5805.51 6102.36,5733.15 R24.1@6102.36,1965.51
RO: R2.2 U1.1 U2.9 | length 1992.7
  Top Layer w15: R2.2@15755.71,3945.51 15755.71,4022.05 15775.71,4042.05 15775.71,4197.05 15795.71,4217.05 16000.71,4217.05 16070.71,4147.05 16185.71,4147.05 16309.46,4023.3 16309.46,3948.3 16441.96,3815.8 16516.96,3815.8 16620.71,3712.05 16620.71,3252.05 16572.24,3203.58 U2.9@16474.25,3203.58
ROW0: R6_Row1.2 R7_Row1.1 U5.1 | length 12776.7
  Top Layer w15: U5.1@16060,4977.36 16060,5060 v1(16210,5210)
  Top Layer w20: R6_Row1.2@5070.28,6362.95 5200.43,6362.95 5313.39,6250 v1(5413.39,6250)
  Top Layer w30: R7_Row1.1@4820.28,6362.95 R6_Row1.2@5070.28,6362.95
  Bottom Layer w20: v1(5413.39,6250) 5763.39,6600 15024.26,6600 15410,6214.26 15410,5750 15560,5600 15910,5600 16210,5300 v1(16210,5210)
ROW1: R6_Row2.2 R7_Row2.1 U5.2 | length 11433.5
  Top Layer w15: U5.2@16010,4977.36 16010,5110 v1(16110,5210)
  Top Layer w20: R6_Row2.2@6251.39,6362.95 6381.54,6362.95 6494.49,6250 v1(6594.49,6250)
  Top Layer w30: R7_Row2.1@6001.39,6362.95 R6_Row2.2@6251.39,6362.95
  Bottom Layer w20: v1(6594.49,6250) 6894.49,6550 15003.55,6550 15350,6203.55 15350,5739.29 15539.29,5550 15860,5550 16110,5300 v1(16110,5210)
ROW2: R6_Row3.2 R7_Row3.1 U5.3 | length 10090.2
  Top Layer w15: U5.3@15960,4977.36 15960,5160 v1(16010,5210)
  Top Layer w20: R6_Row3.2@7432.49,6362.95 7562.64,6362.95 7675.59,6250 v1(7775.59,6250)
  Top Layer w30: R7_Row3.1@7182.49,6362.95 R6_Row3.2@7432.49,6362.95
  Bottom Layer w20: v1(7775.59,6250) 8025.59,6500 14982.84,6500 15300,6182.84 15300,5718.58 15518.58,5500 15810,5500 16010,5300 v1(16010,5210)
ROW3: R6_Row4.2 R7_Row4.1 U5.4 | length 8747
  Top Layer w15: U5.4@15910,4977.36 v1(15910,5210)
  Top Layer w20: R6_Row4.2@8613.59,6362.95 8743.74,6362.95 8856.69,6250 v1(8956.69,6250)
  Top Layer w30: R7_Row4.1@8363.59,6362.95 R6_Row4.2@8613.59,6362.95
  Bottom Layer w20: v1(8956.69,6250) 9156.69,6450 14962.13,6450 15250,6162.13 15250,5697.87 15497.87,5450 15760,5450 15910,5300 v1(15910,5210)
ROW4: R6_Row5.2 R7_Row5.1 U5.5 | length 7446.4
  Top Layer w15: v1(15810,5210) 15860,5160 U5.5@15860,4977.36
  Top Layer w20: R6_Row5.2@9794.69,6362.95 9924.84,6362.95 10037.8,6250 v1(10137.8,6250)
  Top Layer w30: R7_Row5.1@9544.69,6362.95 R6_Row5.2@9794.69,6362.95
  Bottom Layer w20: v1(10137.8,6250) 10287.8,6400 14941.42,6400 15200,6141.42 15200,5675 15475,5400 15710,5400 15810,5300 v1(15810,5210)
ROW5: R6_Row6.2 R7_Row6.1 U5.6 | length 6147.1
  Top Layer w15: v1(15710,5210) 15810,5110 U5.6@15810,4977.36
  Top Layer w20: R6_Row6.2@10975.8,6362.95 11105.94,6362.95 11218.9,6250 v1(11318.9,6250)
  Top Layer w30: R7_Row6.1@10725.8,6362.95 R6_Row6.2@10975.8,6362.95
  Bottom Layer w20: v1(11318.9,6250) 11418.9,6350 14920.71,6350 15150,6120.71 15150,5650 15450,5350 15660,5350 15710,5300 v1(15710,5210)
ROW6: R6_Row7.2 R7_Row7.1 U5.7 | length 4828.1
  Top Layer w15: v1(15610,5210) 15760,5060 U5.7@15760,4977.36
  Top Layer w20: R6_Row7.2@12156.9,6362.95 12287.05,6362.95 12400,6250 v1(12500,6250)
  Top Layer w30: R7_Row7.1@11906.9,6362.95 R6_Row7.2@12156.9,6362.95
  Bottom Layer w20: v1(12500,6250) 12550,6300 14900,6300 15100,6100 15100,5628.75 15428.75,5300 15580,5300 15610,5270 v1(15610,5210)
RST: C2.1 P1.5 R4.1 S1.1 U2.4 | length 2240.6
  Top Layer w15: C2.1@16220.71,2410.55 16417.21,2410.55 16460.71,2367.05 S1.1@16460.71,2261.34 ; S1.1@16460.71,2267.05 16460.71,2182.05 16500.71,2142.05 16575.71,2142.05 16615.71,2182.05 16615.71,2227.05 16685.71,2297.05 16885.71,2297.05 17045.71,2457.05 17070.71,2457.05 17130.71,2517.05 17130.71,2599.05 17094.71,2635.05 16997.71,2635.05 16586.65,3046.1 U2.4@16474.25,3046.1
TCP_RESET: U2.13
USART1_RX: U2.11
USART1_TX: U2.12
VCC: C1.1 C4.1 C5.1 C6.1 C7.1 C9_REG1.1 C9_REG2.1 C9_REG3.1 C11.1 C13.1 C14.1 D2.2 D3.2 D4.2 D12.2 D14.2 D16.1 P1.2 R4.2 U1.8 U2.5 U2.17 U2.27 U2.38 U3_REG1.1 U3_REG1.7 U3_REG2.1 U3_REG2.7 U3_REG3.1 U3_REG3.7 U4.3 U5.16 | length 29919.4
  Top Layer w15: U3_REG2.7@4525.31,1401.89 4525.31,1332.4 4557.72,1300 4782.91,1300 4825.31,1342.4 U3_REG2.1@4825.31,1401.89 4889.29,1401.89 4900.31,1390.87 C9_REG2.1@4900.31,1338.9 ; U3_REG1.7@9249.72,1401.89 9249.72,1332.4 9282.13,1300 9507.32,1300 9549.72,1342.4 U3_REG1.1@9549.72,1401.89 9613.7,1401.89 9624.72,1390.87 C9_REG1.1@9624.72,1338.9 ; U3_REG3.7@13974.13,1401.89 13974.13,1332.4 14006.54,1300 14231.73,1300 14274.13,1342.4 U3_REG3.1@14274.13,1401.89 14338.11,1401.89 14349.13,1390.87 C9_REG3.1@14349.13,1338.9 ; 15305.71,3612.05 15645.71,3612.05 15734.21,3523.54 16133.21,3523.54 16194.71,3462.05 C7.1@16251.81,3462.05 U2.17@16251.81,3331.54 ; 15305.71,4397.05 15495.71,4397.05 15602.2,4290.55 15709.73,4290.55 15725.71,4306.54 U1.8@15775.71,4306.54 ; 15310.71,3397.05 15540.71,3397.05 15798.58,3139.17 C4.1@15897.64,3139.17 ; 15310.71,4875 16025,4875 16060,4840 U5.16@16060,4772.64 16122.64,4772.64 16145,4795 C14.1@16145,4843.5 ; D2.2@15655.71,3943.54 v1(15655.71,4092.05) ; v1@15660.71,4097.05 C1.1@15660.71,4290.55 ; C13.1@15660.71,6203.54 15732.2,6203.54 15805.71,6277.05 C11.1@15860.71,6277.05 ; D14.2@15765.71,5697.05 15765.71,5747.05 15810.71,5792.05 D16.1@15970.71,5792.05 ; D14.2@15765.71,5703.54 v1(15765.71,5827.05) ; C4.1@15897.64,3140.59 16112.16,3140.59 16220.71,3032.05 U2.38@16220.71,2886.65 ; D3.2@16150.71,3943.54 v1(16150.71,4092.05) ; C5.1@16220.31,2753.54 U2.38@16220.31,2886.65 ; C5.1@16220.71,2753.54 16274.21,2753.54 16310.71,2717.05 R4.2@16310.71,2475.51 16423.21,2475.51 16491.67,2407.05 16579.75,2407.05 16648.21,2475.51 P1.2@16760.71,2475.51 ; U2.17@16251.26,3337.05 16251.26,3236.5 16410.71,3077.05 U2.5@16480.71,3077.05 ; U2.5@16474.25,3077.6 16620.16,3077.6 16797.2,2900.55 C6.1@16970.71,2900.55
  Top Layer w25: C9_REG2.1@4900.31,1338.9 4971.81,1338.9 5000.31,1367.4 5000.31,1422.72 5124.59,1547 5502.59,1547 5704.59,1749 5704.59,2133 ; C9_REG1.1@9624.72,1338.9 9696.22,1338.9 9724.72,1367.4 9724.72,1422.72 9849,1547 10227,1547 10429,1749 10429,2133 ; C9_REG3.1@14349.13,1338.9 14420.63,1338.9 14449.13,1367.4 14449.13,1422.72 14573.41,1547 14951.41,1547 15153.41,1749 15153.41,2133
  Top Layer w50: v1(15204,2130) 15305.71,2231.71 15305.71,6617.05 15390.71,6702.05 15980.71,6702.05 16120.71,6562.05 U4.3@16120.71,6342.05 ; D16.1@15965.71,5787.05 15965.71,6157.05 15945.71,6177.05 15900.71,6177.05 15860.71,6217.05 C11.1@15860.71,6282.05 15911.81,6282.05 15961.26,6331.5 U4.3@16120.55,6331.5 ; D16.1@15970.71,5782.05 15970.71,5727.05 16015.71,5682.05 16335.71,5682.05 D12.2@16415.71,5602.05
  Bottom Layer w15: v1(15655.71,4092.05) 15715.71,4157.05 16100.71,4157.05 16150.71,4107.05 v1(16150.71,4092.05)
  Bottom Layer w50: v1(5655.18,2130) v1(15104,2130)
  other v1: 5755.18,2130 10379.59,2130 10479.59,2130
pads on no net: J1_BUS2.3 J1_BUS2.5 J1_BUS2.MH1 J1_BUS2.MH2 J1_BUS3.3 J1_BUS3.5 J1_BUS3.MH1 J1_BUS3.MH2 U2.15 U2.16 U2.19 U2.20 U2.21 U2.23 U2.24 U2.25 U2.26 U2.29 U2.34 U2.35 U2.36 U2.40 U2.41 U2.42 U2.43 U2.44

## Polygon pours and split planes (outlines as drawn)
GND on Top Layer "Top Layer-No Net" (solid): 690,720 690,7235 17890,7235 17890,720
VCC on Top Layer "Top Layer-No Net" (solid, pour order 1015): 15387,4875 15387,4873 15285,4771 15285,4979
EXTSUPP_Row1 on Top Layer "Top Layer-No Net" (solid, pour order 1000): 5070.82,6797.12 5068.82,6797.12 4966.82,6899.12 5174.82,6899.12
VCC on Top Layer "Top Layer-No Net" (solid, pour order 1000): 10431,2031 10429,2031 10327,2133 10535,2133
VCC on Top Layer "Top Layer-No Net" (solid): 5780.18,2080 5805.18,2105 5805.18,2155 5780.18,2180 5630.18,2180 5605.18,2155 5605.18,2105 5630.18,2080
VCC on Top Layer "Top Layer-No Net" (solid): 10504.59,2080 10529.59,2105 10529.59,2155 10504.59,2180 10354.59,2180 10329.59,2155 10329.59,2105 10354.59,2080
VCC on Top Layer "Top Layer-No Net" (solid): 15229,2080 15254,2105 15254,2155 15229,2180 15079,2180 15054,2155 15054,2105 15079,2080
EXTSUPP_Row1 on Top Layer "Top Layer-No Net" (solid, pour order 1000): 4430.55,6797.12 4428.55,6797.12 4326.55,6899.12 4534.55,6899.12
OUT_Row1 on Top Layer "Top Layer-No Net" (solid): 4445.39,2607.69 4420.39,2582.69 4420.39,2532.69 4445.39,2507.69 4595.39,2507.69 4620.39,2532.69 4620.39,2582.69 4595.39,2607.69
OUT_Row1 on Top Layer "Top Layer-No Net" (solid, pour order 1000): 4520.28,2662.69 4522.28,2662.69 4624.28,2560.69 4416.28,2560.69
OUT_Row2 on Top Layer "Top Layer-No Net" (solid): 5626.49,3198.24 5601.49,3173.24 5601.49,3123.24 5626.49,3098.24 5776.49,3098.24 5801.49,3123.24 5801.49,3173.24 5776.49,3198.24
OUT_Row2 on Top Layer "Top Layer-No Net" (solid, pour order 1000): 5701.39,3253.24 5703.39,3253.24 5805.39,3151.24 5597.39,3151.24
OUT_Row3 on Top Layer "Top Layer-No Net" (solid): 6807.59,3788.8 6782.59,3763.8 6782.59,3713.8 6807.59,3688.8 6957.59,3688.8 6982.59,3713.8 6982.59,3763.8 6957.59,3788.8
OUT_Row3 on Top Layer "Top Layer-No Net" (solid, pour order 1000): 6882.49,3843.8 6884.49,3843.8 6986.49,3741.8 6778.49,3741.8
OUT_Row4 on Top Layer "Top Layer-No Net" (solid): 7988.69,4379.35 7963.69,4354.35 7963.69,4304.35 7988.69,4279.35 8138.69,4279.35 8163.69,4304.35 8163.69,4354.35 8138.69,4379.35
OUT_Row4 on Top Layer "Top Layer-No Net" (solid, pour order 1000): 8063.59,4434.35 8065.59,4434.35 8167.59,4332.35 7959.59,4332.35
OUT_Row5 on Top Layer "Top Layer-No Net" (solid): 9169.8,4969.9 9144.8,4944.9 9144.8,4894.9 9169.8,4869.9 9319.8,4869.9 9344.8,4894.9 9344.8,4944.9 9319.8,4969.9
OUT_Row5 on Top Layer "Top Layer-No Net" (solid, pour order 1000): 9244.69,5024.9 9246.69,5024.9 9348.69,4922.9 9140.69,4922.9
OUT_Row6 on Top Layer "Top Layer-No Net" (solid): 10350.9,5560.45 10325.9,5535.45 10325.9,5485.45 10350.9,5460.45 10500.9,5460.45 10525.9,5485.45 10525.9,5535.45 10500.9,5560.45
OUT_Row6 on Top Layer "Top Layer-No Net" (solid, pour order 1000): 10425.8,5615.45 10427.8,5615.45 10529.8,5513.45 10321.8,5513.45
OUT_Row7 on Top Layer "Top Layer-No Net" (solid, pour order 1000): 11606.9,6206 11608.9,6206 11710.9,6104 11502.9,6104
OUT_Row7 on Top Layer "Top Layer-No Net" (solid): 11532,6151 11507,6126 11507,6076 11532,6051 11682,6051 11707,6076 11707,6126 11682,6151
EXTSUPP_Row1 on Top Layer "Top Layer-No Net" (solid, pour order 1000): 11517.17,6797.12 11515.17,6797.12 11413.17,6899.12 11621.17,6899.12
EXTSUPP_Row1 on Top Layer "Top Layer-No Net" (solid, pour order 1000): 12158.17,6798.12 12156.17,6798.12 12054.17,6900.12 12262.17,6900.12
EXTSUPP_Row1 on Top Layer "Top Layer-No Net" (solid, pour order 1000): 6252.66,6798.12 6250.66,6798.12 6148.66,6900.12 6356.66,6900.12
EXTSUPP_Row1 on Top Layer "Top Layer-No Net" (solid, pour order 1000): 5611.66,6797.12 5609.66,6797.12 5507.66,6899.12 5715.66,6899.12
EXTSUPP_Row1 on Top Layer "Top Layer-No Net" (solid, pour order 1000): 7433.76,6798.12 7431.76,6798.12 7329.76,6900.12 7537.76,6900.12
EXTSUPP_Row1 on Top Layer "Top Layer-No Net" (solid, pour order 1000): 6792.76,6797.12 6790.76,6797.12 6688.76,6899.12 6896.76,6899.12
EXTSUPP_Row1 on Top Layer "Top Layer-No Net" (solid, pour order 1000): 8614.86,6798.12 8612.86,6798.12 8510.86,6900.12 8718.86,6900.12
EXTSUPP_Row1 on Top Layer "Top Layer-No Net" (solid, pour order 1000): 7973.86,6797.12 7971.86,6797.12 7869.86,6899.12 8077.86,6899.12
EXTSUPP_Row1 on Top Layer "Top Layer-No Net" (solid, pour order 1000): 9795.96,6798.12 9793.96,6798.12 9691.96,6900.12 9899.96,6900.12
EXTSUPP_Row1 on Top Layer "Top Layer-No Net" (solid, pour order 1000): 9154.96,6797.12 9152.96,6797.12 9050.96,6899.12 9258.96,6899.12
EXTSUPP_Row1 on Top Layer "Top Layer-No Net" (solid, pour order 1000): 10977.06,6798.12 10975.06,6798.12 10873.06,6900.12 11081.06,6900.12
EXTSUPP_Row1 on Top Layer "Top Layer-No Net" (solid, pour order 1000): 10336.06,6797.12 10334.06,6797.12 10232.06,6899.12 10440.06,6899.12
GND on Top Layer "Top Layer-No Net" (solid, pour order 1002): 16390.71,4547.05 16638.21,4547.05 16638.21,4337.05 16390.71,4337.05
B on Top Layer "Top Layer-No Net" (solid, pour order 1000): 16763.31,4474.45 17053.31,4474.45 16948.31,4579.45 16658.31,4579.45
A on Top Layer "Top Layer-No Net" (solid, pour order 1001): 16670.71,4307.05 16763.31,4399.65 17043.31,4399.65 17045.71,4402.05 16950.71,4307.05
VCC on Top Layer "Top Layer-No Net" (solid, pour order 1015): 15385.71,4397.05 15385.71,4395.05 15283.71,4293.05 15283.71,4501.05
VCC on Top Layer "Top Layer-No Net" (solid, pour order 1015): 15382.71,3612.05 15382.71,3610.05 15280.71,3508.05 15280.71,3716.05
VCC on Top Layer "Top Layer-No Net" (solid, pour order 1015): 15382.71,3397.05 15382.71,3395.05 15280.71,3293.05 15280.71,3501.05
EXTSUPP_Row1 on Top Layer "Top Layer-No Net" (solid, pour order 1015): 16299.8,6790.57 16297.8,6790.57 16195.8,6892.57 16403.8,6892.57
RES01 on Top Layer "Top Layer-No Net" (solid, pour order 1000): 14883.39,2261.51 14883.39,2263.51 14985.39,2365.51 14985.39,2157.51
RES01 on Top Layer "Top Layer-No Net" (solid, pour order 1000): 14883.39,3442.61 14883.39,3444.61 14985.39,3546.61 14985.39,3338.61
RES01 on Top Layer "Top Layer-No Net" (solid, pour order 1000): 14883.39,4033.16 14883.39,4035.16 14985.39,4137.16 14985.39,3929.16
RES01 on Top Layer "Top Layer-No Net" (solid, pour order 1000): 14883.39,4623.71 14883.39,4625.71 14985.39,4727.71 14985.39,4519.71
RES01 on Top Layer "Top Layer-No Net" (solid, pour order 1000): 14883.39,5214.26 14883.39,5216.26 14985.39,5318.26 14985.39,5110.26
RES01 on Top Layer "Top Layer-No Net" (solid, pour order 1000): 14883.39,2852.06 14883.39,2854.06 14985.39,2956.06 14985.39,2748.06
RES02 on Top Layer "Top Layer-No Net" (solid, pour order 1000): 14292.84,2261.51 14292.84,2263.51 14394.84,2365.51 14394.84,2157.51
RES02 on Top Layer "Top Layer-No Net" (solid, pour order 1000): 14292.84,3442.61 14292.84,3444.61 14394.84,3546.61 14394.84,3338.61
RES02 on Top Layer "Top Layer-No Net" (solid, pour order 1000): 14292.84,4033.16 14292.84,4035.16 14394.84,4137.16 14394.84,3929.16
RES02 on Top Layer "Top Layer-No Net" (solid, pour order 1000): 14292.84,4623.71 14292.84,4625.71 14394.84,4727.71 14394.84,4519.71
RES02 on Top Layer "Top Layer-No Net" (solid, pour order 1000): 14292.84,5214.26 14292.84,5216.26 14394.84,5318.26 14394.84,5110.26
RES02 on Top Layer "Top Layer-No Net" (solid, pour order 1000): 14292.84,2852.06 14292.84,2854.06 14394.84,2956.06 14394.84,2748.06
RES03 on Top Layer "Top Layer-No Net" (solid, pour order 1000): 13702.29,2261.51 13702.29,2263.51 13804.29,2365.51 13804.29,2157.51
RES03 on Top Layer "Top Layer-No Net" (solid, pour order 1000): 13702.29,3442.61 13702.29,3444.61 13804.29,3546.61 13804.29,3338.61
RES03 on Top Layer "Top Layer-No Net" (solid, pour order 1000): 13702.29,4033.16 13702.29,4035.16 13804.29,4137.16 13804.29,3929.16
RES03 on Top Layer "Top Layer-No Net" (solid, pour order 1000): 13702.29,4623.71 13702.29,4625.71 13804.29,4727.71 13804.29,4519.71
RES03 on Top Layer "Top Layer-No Net" (solid, pour order 1000): 13702.29,5214.26 13702.29,5216.26 13804.29,5318.26 13804.29,5110.26
RES03 on Top Layer "Top Layer-No Net" (solid, pour order 1000): 13702.29,2852.06 13702.29,2854.06 13804.29,2956.06 13804.29,2748.06
RES04 on Top Layer "Top Layer-No Net" (solid, pour order 1000): 13111.74,2261.51 13111.74,2263.51 13213.74,2365.51 13213.74,2157.51
RES04 on Top Layer "Top Layer-No Net" (solid, pour order 1000): 13111.74,3442.61 13111.74,3444.61 13213.74,3546.61 13213.74,3338.61
RES04 on Top Layer "Top Layer-No Net" (solid, pour order 1000): 13111.74,4033.16 13111.74,4035.16 13213.74,4137.16 13213.74,3929.16
RES04 on Top Layer "Top Layer-No Net" (solid, pour order 1000): 13111.74,4623.71 13111.74,4625.71 13213.74,4727.71 13213.74,4519.71
RES04 on Top Layer "Top Layer-No Net" (solid, pour order 1000): 13111.74,5214.26 13111.74,5216.26 13213.74,5318.26 13213.74,5110.26
RES04 on Top Layer "Top Layer-No Net" (solid, pour order 1000): 13111.74,2852.06 13111.74,2854.06 13213.74,2956.06 13213.74,2748.06
RES05 on Top Layer "Top Layer-No Net" (solid, pour order 1000): 12521.19,2261.51 12521.19,2263.51 12623.19,2365.51 12623.19,2157.51
RES05 on Top Layer "Top Layer-No Net" (solid, pour order 1000): 12521.19,3442.61 12521.19,3444.61 12623.19,3546.61 12623.19,3338.61
RES05 on Top Layer "Top Layer-No Net" (solid, pour order 1000): 12521.19,4033.16 12521.19,4035.16 12623.19,4137.16 12623.19,3929.16
RES05 on Top Layer "Top Layer-No Net" (solid, pour order 1000): 12521.19,4623.71 12521.19,4625.71 12623.19,4727.71 12623.19,4519.71
RES05 on Top Layer "Top Layer-No Net" (solid, pour order 1000): 12521.19,5214.26 12521.19,5216.26 12623.19,5318.26 12623.19,5110.26
RES05 on Top Layer "Top Layer-No Net" (solid, pour order 1000): 12521.19,2852.06 12521.19,2854.06 12623.19,2956.06 12623.19,2748.06
RES06 on Top Layer "Top Layer-No Net" (solid, pour order 1000): 11930.63,2261.51 11930.63,2263.51 12032.63,2365.51 12032.63,2157.51
RES06 on Top Layer "Top Layer-No Net" (solid, pour order 1000): 11930.63,3442.61 11930.63,3444.61 12032.63,3546.61 12032.63,3338.61
RES06 on Top Layer "Top Layer-No Net" (solid, pour order 1000): 11930.63,4033.16 11930.63,4035.16 12032.63,4137.16 12032.63,3929.16
RES06 on Top Layer "Top Layer-No Net" (solid, pour order 1000): 11930.63,4623.71 11930.63,4625.71 12032.63,4727.71 12032.63,4519.71
RES06 on Top Layer "Top Layer-No Net" (solid, pour order 1000): 11930.63,5214.26 11930.63,5216.26 12032.63,5318.26 12032.63,5110.26
RES06 on Top Layer "Top Layer-No Net" (solid, pour order 1000): 11930.63,2852.06 11930.63,2854.06 12032.63,2956.06 12032.63,2748.06
RES07 on Top Layer "Top Layer-No Net" (solid, pour order 1000): 11340.08,2261.51 11340.08,2263.51 11442.08,2365.51 11442.08,2157.51
RES07 on Top Layer "Top Layer-No Net" (solid, pour order 1000): 11340.08,3442.61 11340.08,3444.61 11442.08,3546.61 11442.08,3338.61